# EAGLE board sercon1 (EAGLE 3.55)
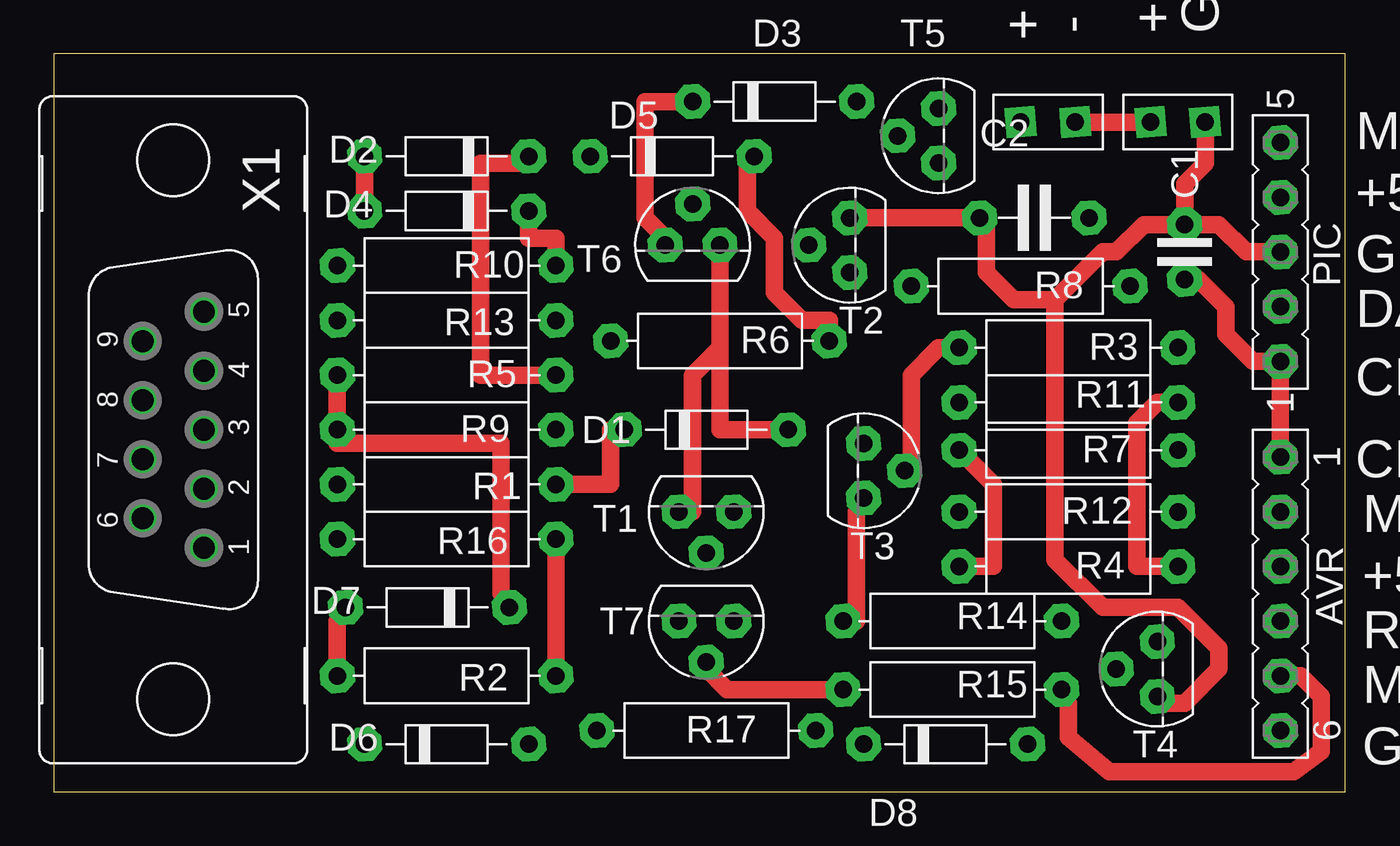
[diagram p0: board, top side]
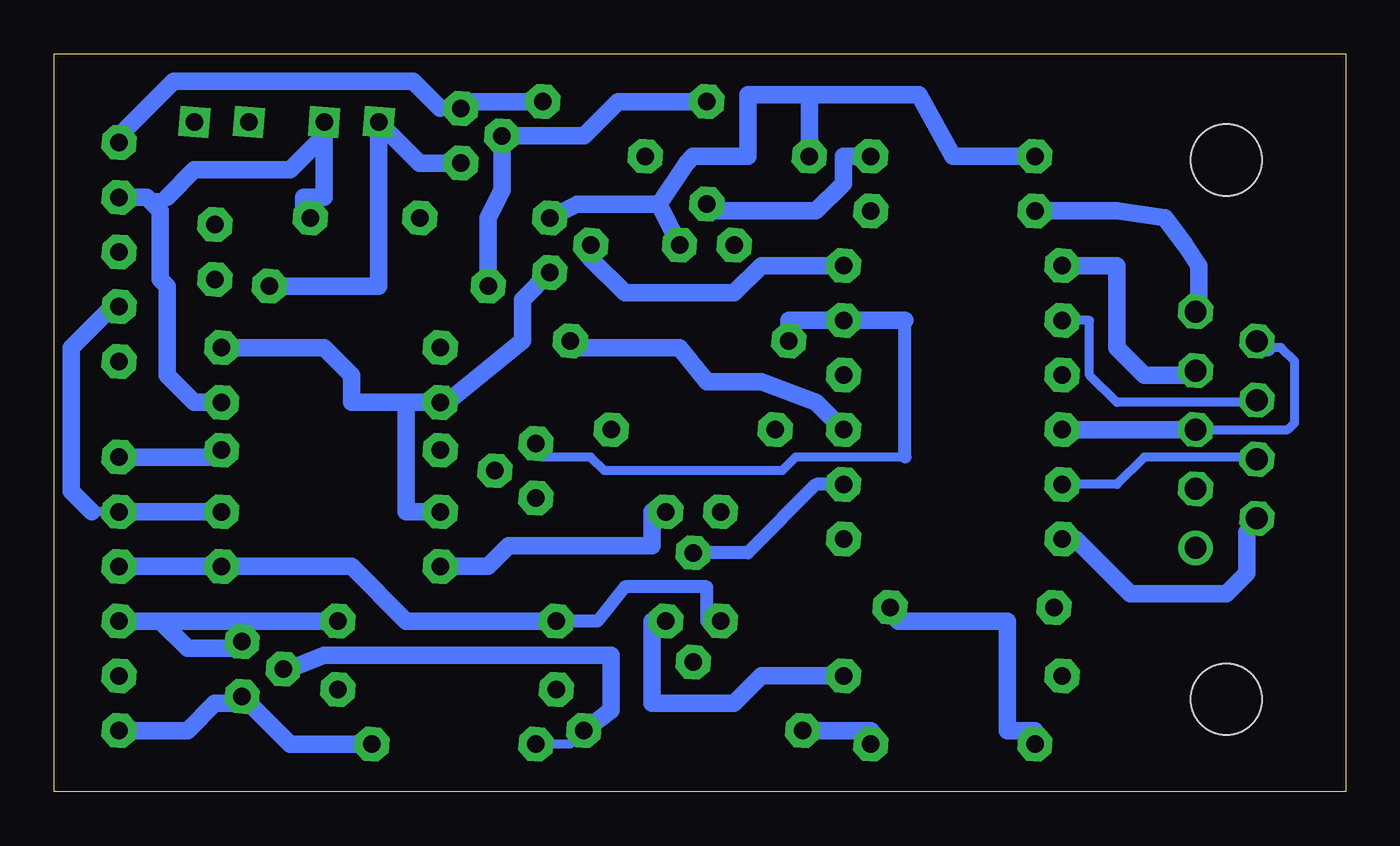
[diagram p1: board, bottom side, seen from below]

Size 60 x 34.28 mm. Coordinates in mm from the lower left corner, seen from the top.
Outline: 0,0 60,0 60,34.28 0,34.28 0,0
Copper layers used: Top, Bottom

## Footprints (pad centres in the part's own frame; a part is rotated, then mirrored left to right if it is on the bottom)
06 = drill 0.813 pad 1.6 octagon:  -6.35,0;  -3.81,0;  -1.27,0;  1.27,0;  3.81,0;  6.35,0
2,5 = drill 0.813 pad 1.6 octagon:  -1.27,0;  1.27,0
5 = drill 0.813 pad 1.6 octagon:  -2.54,0;  2.54,0
7,5 = drill 0.813 pad 1.6 octagon:  -3.81,0;  3.81,0
05-1 = drill 0.813 pad 1.6 octagon:  -5.08,0;  -2.54,0;  0,0;  2.54,0;  5.08,0
N2 = drill 0.813 pad 1.397 square:  -1.27,0;  1.27,0
10 = drill 0.813 pad 1.6 octagon:  -5.08,0;  5.08,0
92 = drill 0.813 pad 1.6 octagon:  1.27,0;  0,1.905;  -1.27,0
9V = drill 1.016 pad 1.6 round:  5.486,1.422 | drill 1.016 pad 1.6 octagon:  2.743,1.422;  0,1.422;  -2.743,1.422;  -5.486,1.422;  4.115,-1.422;  1.372,-1.422;  -1.372,-1.422;  -4.115,-1.422 | hole 3.302: -12.522,0; 12.522,0

## Placement (x,y rotation side)
AVR  Atmel-AVR  [06]  56.98,9.2 270 top
C1  1n  [2,5]  52.54,25.08 270 top
C2  100n  [5]  45.56,26.66 0 top
D1  1N4148  [7,5]  30.32,16.82 180 top
D2  1N4148  [7,5]  18.25,29.52 0 top
D3  1N4148  [7,5]  33.49,32.06 180 top
D4  1N4148  [7,5]  18.25,26.98 0 top
D5  1N4148  [7,5]  28.73,29.52 180 top
D6  1N4148  [7,5]  18.25,2.22 180 top
D7  1N4148  [7,5]  17.36,8.57 0 top
D8  1N4148  [7,5]  41.43,2.22 180 top
PIC  PIC16x84  [05-1]  56.98,25.08 90 top
PIC-PROG  CON2  [N2]  46.19,31.11 180 top
R1  22k  [10]  18.25,14.28 0 top
R2  4k7  [10]  18.25,5.39 180 top
R3  4k7  [10]  47.14,20.63 0 top
R4  4k7  [10]  47.14,10.47 0 top
R5  22k  [10]  18.25,19.36 0 top
R6  3k3  [10]  30.95,20.95 0 top
R7  1k  [10]  47.14,15.87 0 top
R8  10k  [10]  44.92,23.49 0 top
R9  3k3  [10]  18.25,16.82 180 top
R10  22k  [10]  18.25,24.44 0 top
R11  4k7  [10]  47.14,18.09 0 top
R12  1k  [10]  47.14,13.01 0 top
R13  R330  [10]  18.25,21.9 0 top
R14  4k7  [10]  41.75,7.93 180 top
R15  4k7  [10]  41.75,4.76 180 top
R16  R330  [10]  18.25,11.74 0 top
R17  22k  [10]  30.32,2.85 0 top
T1  BC547  [92]  30.32,13.01 180 top
T2  BC547  [92]  36.98,25.4 90 top
T3  BC557  [92]  37.62,14.92 270 top
T4  BC557  [92]  51.27,5.71 90 top
T5  BC547  [92]  41.11,30.48 90 top
T6  BC547  [92]  29.68,25.4 0 top
T7  BC557  [92]  30.32,7.93 180 top
U$1  CON2  [N2]  52.22,31.11 180 top
X1  COM-Port  [9V]  5.55,16.82 270 top

## Library data of the parts
AVR PIC = con-lsta
C1 C2 D1-D8 R1-R17 = discrete
PIC-PROG U$1 = d-part
T1 T2 T5 T6 = npn
T3 T4 T7 = pnp
X1 = subd

## Nets
+5V: AVR. C2. PIC-PROG. PIC. R4. R11. R14. T3. T7. U$1.
GND: AVR. C1. C2. D1. D2. D4. D5. D8. PIC. T1. T2. T4. T6. U$1. X1.
N$1: D1. R1. T1.
N$2: R4. R7. T1.
N$3: D3. R8. T5. T6.
N$4: D2. R5. T6.
N$5: R1. X1.
N$6: R10. X1.
N$7: R3. T3.
N$8: R6. R13. T3.
N$9: R13. X1.
N$10: D5. R6. R9.
N$11: AVR. C1. PIC. R7.
N$12: D6. D7. R5. R9. X1.
N$13: R3. R11. R12. T2.
N$14: D3. PIC. T5.
N$15: D4. R10. T2.
N$16: PIC-PROG. R8. T5.
N$17: D6. R17.
N$18: AVR. R14. T4.
N$19: AVR. PIC. R12.
N$20: D8. R17. T4.
N$21: R15. T7.
N$22: R2. R16. T7.
N$23: R16. X1.
N$24: D7. R2.
N$25: AVR. R15.

## Tracks (layer width: path | path; a pad name or v marks a point on that pad's centre or on a via)
+5V
  Top 0.406: 37.3,13.01 37.62,13.65 | R14. 37.3,7.93 | 51.27,31.11 U$1.
  Top 0.813: R4. 50.32,10.47 50.32,17.14 51.27,18.09 R11. 52.54,18.09 | 37.3,7.93 37.3,13.01 | 47.46,31.11 U$1.
  Bottom 0.406: 29.04,7.93 29.68,7.93 | 55.72,27.62 54.76,27.62 | 47.46,30.48 47.46,31.11 | 48.41,26.66 C2.
  Bottom 0.61: 29.68,7.93 29.68,9.52 33.49,9.52 34.76,7.93 R14.
  Bottom 0.813: 56.98,10.47 R4. 46.19,10.47 43.65,7.93 R14. | R11. 53.49,18.09 54.76,19.36 54.76,23.49 55.08,23.81 55.08,26.98 55.72,27.62 56.98,27.62 57.3,27.62 | 54.76,27.62 53.49,28.89 49.05,28.89 47.46,30.48 | 48.41,26.66 48.41,27.62 47.46,27.62 47.46,31.11
GND  (1 unrouted)
  Top 0.406: 30.95,25.4 30.95,25.71 | T4. 51.59,4.12 | 56.98,25.08 56.98,24.76 56.67,25.08 | 43.33,26.35 43.02,26.66
  Top 0.813: 30.95,20.63 29.68,19.36 29.68,13.01 29.04,13.01 | 30.95,20.63 30.95,25.4 | 30.95,20.63 30.95,16.82 34.12,16.82 | 14.44,26.98 14.44,29.52 | 51.59,4.12 52.54,4.12 54.13,5.71 54.13,6.66 52.22,8.57 48.73,8.57 46.51,10.79 46.51,22.86 | 52.54,26.35 52.54,28.25 53.49,29.2 53.49,31.11 | 52.54,26.35 54.13,26.35 55.4,25.08 56.67,25.08 | 46.51,22.86 48.73,25.08 49.36,25.08 50.64,26.35 52.54,26.35 | 46.51,22.86 44.6,22.86 43.33,24.12 43.33,26.35 | 43.02,26.66 36.98,26.66
  Bottom 0.406: 6.97,22.31 6.82,21.9 | T4. 51.27,4.12
  Bottom 0.813: 6.82,21.9 6.82,24.44 7.46,25.4 8.41,26.66 10.63,26.98 14.44,26.98 | 24.92,32.38 19.84,32.38 18.25,29.52 14.44,29.52 | 31.9,27.3 30.63,29.2 30.32,29.52 27.77,29.52 27.77,32.38 24.92,32.38 | 31.9,27.3 30.95,25.4 | 24.92,32.38 D5. | 51.27,4.12 52.54,4.12 53.81,2.85 AVR. | 45.24,2.22 49.05,2.22 T4. | 31.9,27.3 35.71,27.3 36.98,26.66
N$1
  Top 0.813: R1. 25.87,14.28 25.87,16.82 D1.
  Bottom 0.61: 30.32,11.11 27.77,11.11 24.6,14.28 R1.
N$2
  Top 0.813: 42.06,15.87 43.65,14.28 43.65,10.47 42.06,10.47
  Bottom 0.406: 42.06,10.47 42.38,10.47
  Bottom 0.813: 42.06,10.47 39.84,10.47 38.89,11.42 32.22,11.42 32.22,13.01 T1.
N$3
  Top 0.406: T6. 28.41,25.71
  Top 0.813: 28.41,25.71 27.46,26.66 27.46,32.06 D3.
  Bottom 0.813: D3. 33.81,32.06 35.39,30.48 39.2,30.48 39.2,27.94 39.84,26.66 39.84,23.49
N$4
  Top 0.406: 22.06,29.2 D2.
  Top 0.813: R5. 19.84,19.36 19.84,29.2 22.06,29.2
  Bottom 0.406: 29.68,26.98 29.68,27.3
  Bottom 0.813: 29.68,26.98 24.6,26.98 23.33,28.25 23.33,29.52 D2.
N$5
  Bottom 0.406: 13.17,14.28 10.63,14.28 9.36,15.55 4.28,15.55 4.13,15.45
N$6
  Bottom 0.406: 6.97,19.57 6.82,19.36
  Bottom 0.813: 6.82,19.36 9.36,19.36 10.63,20.63 10.63,24.44 13.17,24.44
N$7
  Top 0.406: 39.52,14.92 39.84,15.55 | 42.06,20.63 42.38,20.63
  Top 0.813: 39.84,15.55 39.84,19.36 41.11,20.63 42.06,20.63
N$8
  Bottom 0.406: 25.87,21.9 R13. | 20.47,15.55 25.55,15.55 26.19,14.92 34.44,14.92 35.08,15.55 37.3,15.55 T3.
  Bottom 0.61: 20.47,15.55 20.47,21.9
  Bottom 0.813: 20.47,21.9 25.87,21.9 25.87,20.95
N$9
  Bottom 0.406: 13.17,21.9 11.9,21.9 11.9,19.36 10.63,18.09 4.28,18.09 4.13,18.19
N$10
  Top 0.406: 32.22,29.52 32.54,29.52 | R6. 36.03,20.63
  Top 0.813: 32.22,29.52 32.22,26.98 33.49,25.71 33.49,23.17 34.76,21.9 36.03,21.9 R6.
  Bottom 0.406: 36.03,20.63 R6.
  Bottom 0.813: 23.33,16.82 24.6,18.09 27.14,19.05 29.68,19.05 30.95,20.63 36.03,20.63
N$11
  Top 0.406: 56.98,20 57.3,19.68 56.98,19.68 | C1. 53.17,23.81
  Top 0.813: 56.98,15.55 56.98,19.68 56.98,20 55.72,20 54.44,21.27 54.44,22.54 53.17,23.81
  Bottom 0.406: R7. 52.54,15.55
  Bottom 0.813: 52.54,15.55 56.98,15.55
N$12
  Top 0.406: D7. 20.79,9.2
  Top 0.813: 13.17,19.36 R9. 13.17,16.19 20.79,16.19 20.79,9.2
  Bottom 0.406: 6.97,16.82 6.82,16.82 2.69,16.82 2.38,17.14 2.38,20 3.01,20.63 3.65,20.63 | D6. 14.44,2.85
  Bottom 0.813: R9. 6.97,16.82 | 14.44,2.85 15.71,2.85 15.71,7.93 20.79,7.93 D7. | X1. 3.98,20.94 3.96,20.95 3.65,20.63
N$13
  Bottom 0.406: R3. 52.54,20.63 | 42.06,18.09 41.75,18.09
  Bottom 0.813: 43.65,18.09 43.65,13.01 42.06,13.01 | 43.65,18.09 42.06,18.09 | R3. 47.46,20.63 46.19,19.36 46.19,18.09 43.65,18.09 | 41.75,18.09 38.25,20.95 38.25,22.86 T2.
N$14
  Bottom 0.406: 56.98,29.84 57.3,30.16 PIC. | 40.79,32.06 41.11,31.75 42.06,31.75
  Bottom 0.813: 40.79,32.06 37.3,32.06 | 42.06,31.75 43.33,33.01 54.44,33.01 57.3,30.16
N$15
  Top 0.813: R10. 23.33,25.71 22.06,25.71 D4.
  Bottom 0.406: 35.08,24.76 35.08,25.4
  Bottom 0.813: 35.08,24.76 33.49,23.17 28.41,23.17 27.14,24.44 R10.
N$16
  Bottom 0.813: T5. 43.02,29.2 PIC-PROG. 44.92,23.49 R8.
N$17
  Bottom 0.813: 22.06,2.22 22.06,2.85 25.23,2.85
N$18
  Bottom 0.406: 51.27,6.66 51.27,6.98
  Bottom 0.813: 51.27,6.66 53.81,6.66 55.08,7.93 | 55.08,7.93 56.98,7.93 | 46.83,7.93 55.08,7.93
N$19
  Bottom 0.406: 57.3,22.54 56.98,22.54 | 56.98,13.01 58.25,13.01
  Bottom 0.813: R12. 56.98,13.01 | 57.3,22.54 59.21,20.63 59.21,13.96 58.25,13.01
N$20
  Bottom 0.406: 49.05,5.71 49.36,5.71 | D8. 36.03,2.22 R17.
  Bottom 0.813: 49.05,5.71 47.46,6.35 34.12,6.35 34.12,3.8 R17.
N$21
  Top 0.406: 30.32,6.03 30.32,5.71
  Top 0.813: R15. 31.27,4.76 30.32,5.71
N$22
  Top 0.813: 23.33,5.39 R16.
  Bottom 0.406: 32.22,7.93 T7.
  Bottom 0.813: 32.22,7.93 32.22,4.12 28.41,4.12 27.14,5.39 23.33,5.39
N$23
  Bottom 0.406: 12.54,11.74 13.17,11.74 | 4.13,12.71 3.98,12.71 3.96,12.69 4.6,12.06
  Bottom 0.813: 12.54,11.74 10,9.2 5.55,9.2 4.6,10.15 4.6,12.06
N$24
  Top 0.406: 13.17,7.93 13.55,8.57
  Top 0.813: R2. 13.17,7.93
N$25
  Top 0.406: 46.83,4.44 46.83,4.76
  Top 0.813: 56.98,5.39 57.94,5.39 58.89,4.44 58.89,1.9 57.62,0.95 49.05,0.95 47.14,2.53 47.14,4.12 46.83,4.44

## Text on the board
tPlace: + | - | +5V | Gnd | MCLR | +5V | GND | DATA | CLOCK | CLOCK | MOSI | +5V | RESET | MISO | GND